# Altium PCB PCB1.PcbDoc
Units mm, origin at the board's own origin, x right, y up, seen from the top; angles counter-clockwise.
Board outline 58 x 59 mm, 2 copper layers (Top Layer, Bottom Layer); 12 components, 9 nets, 60 pads, 17 vias.
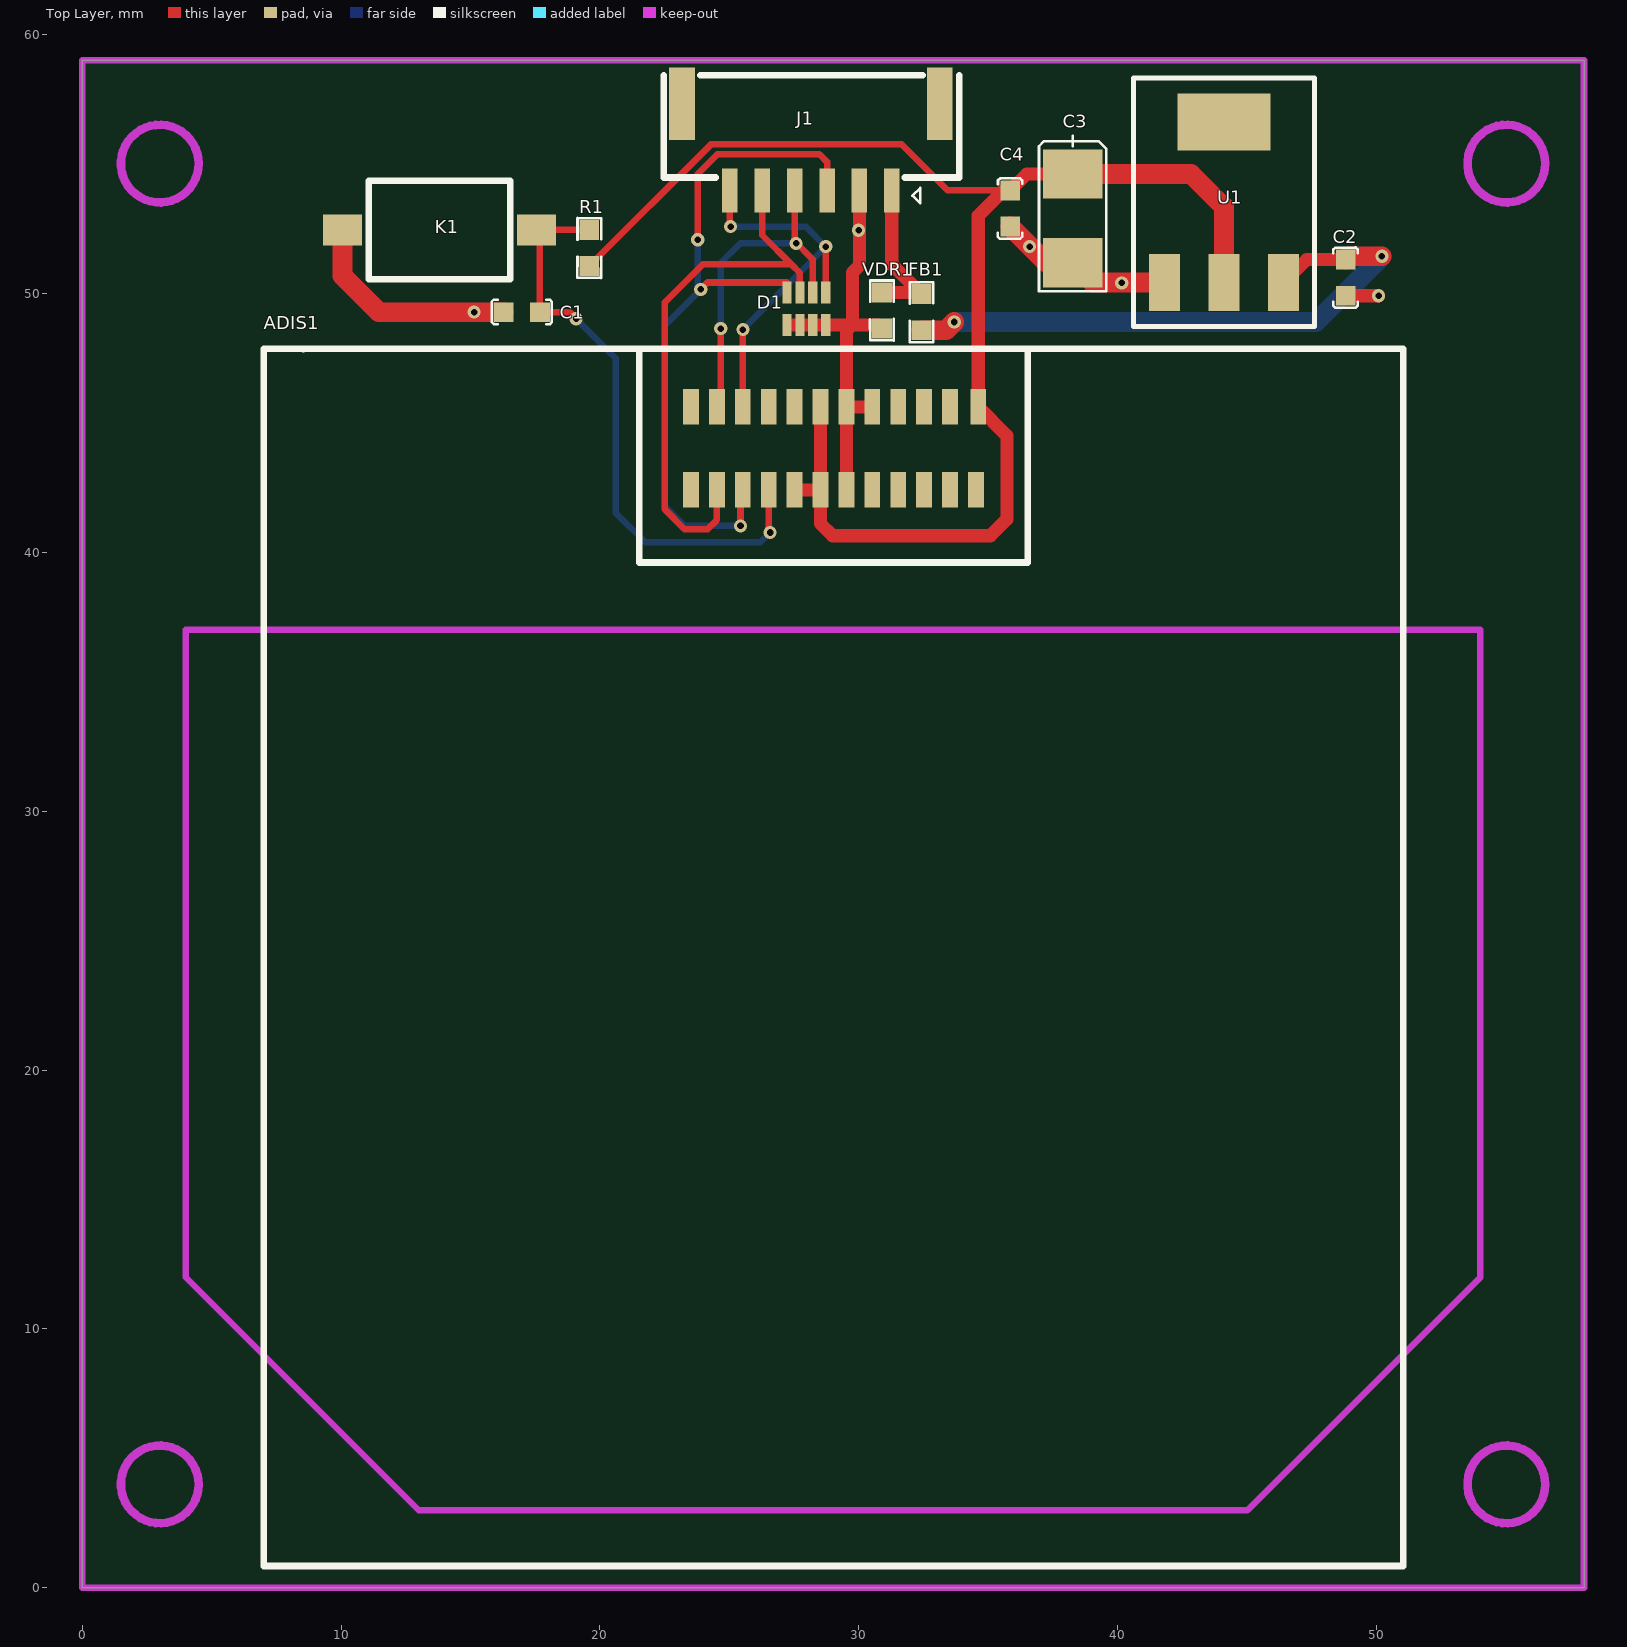
[diagram p0: Top Layer view]
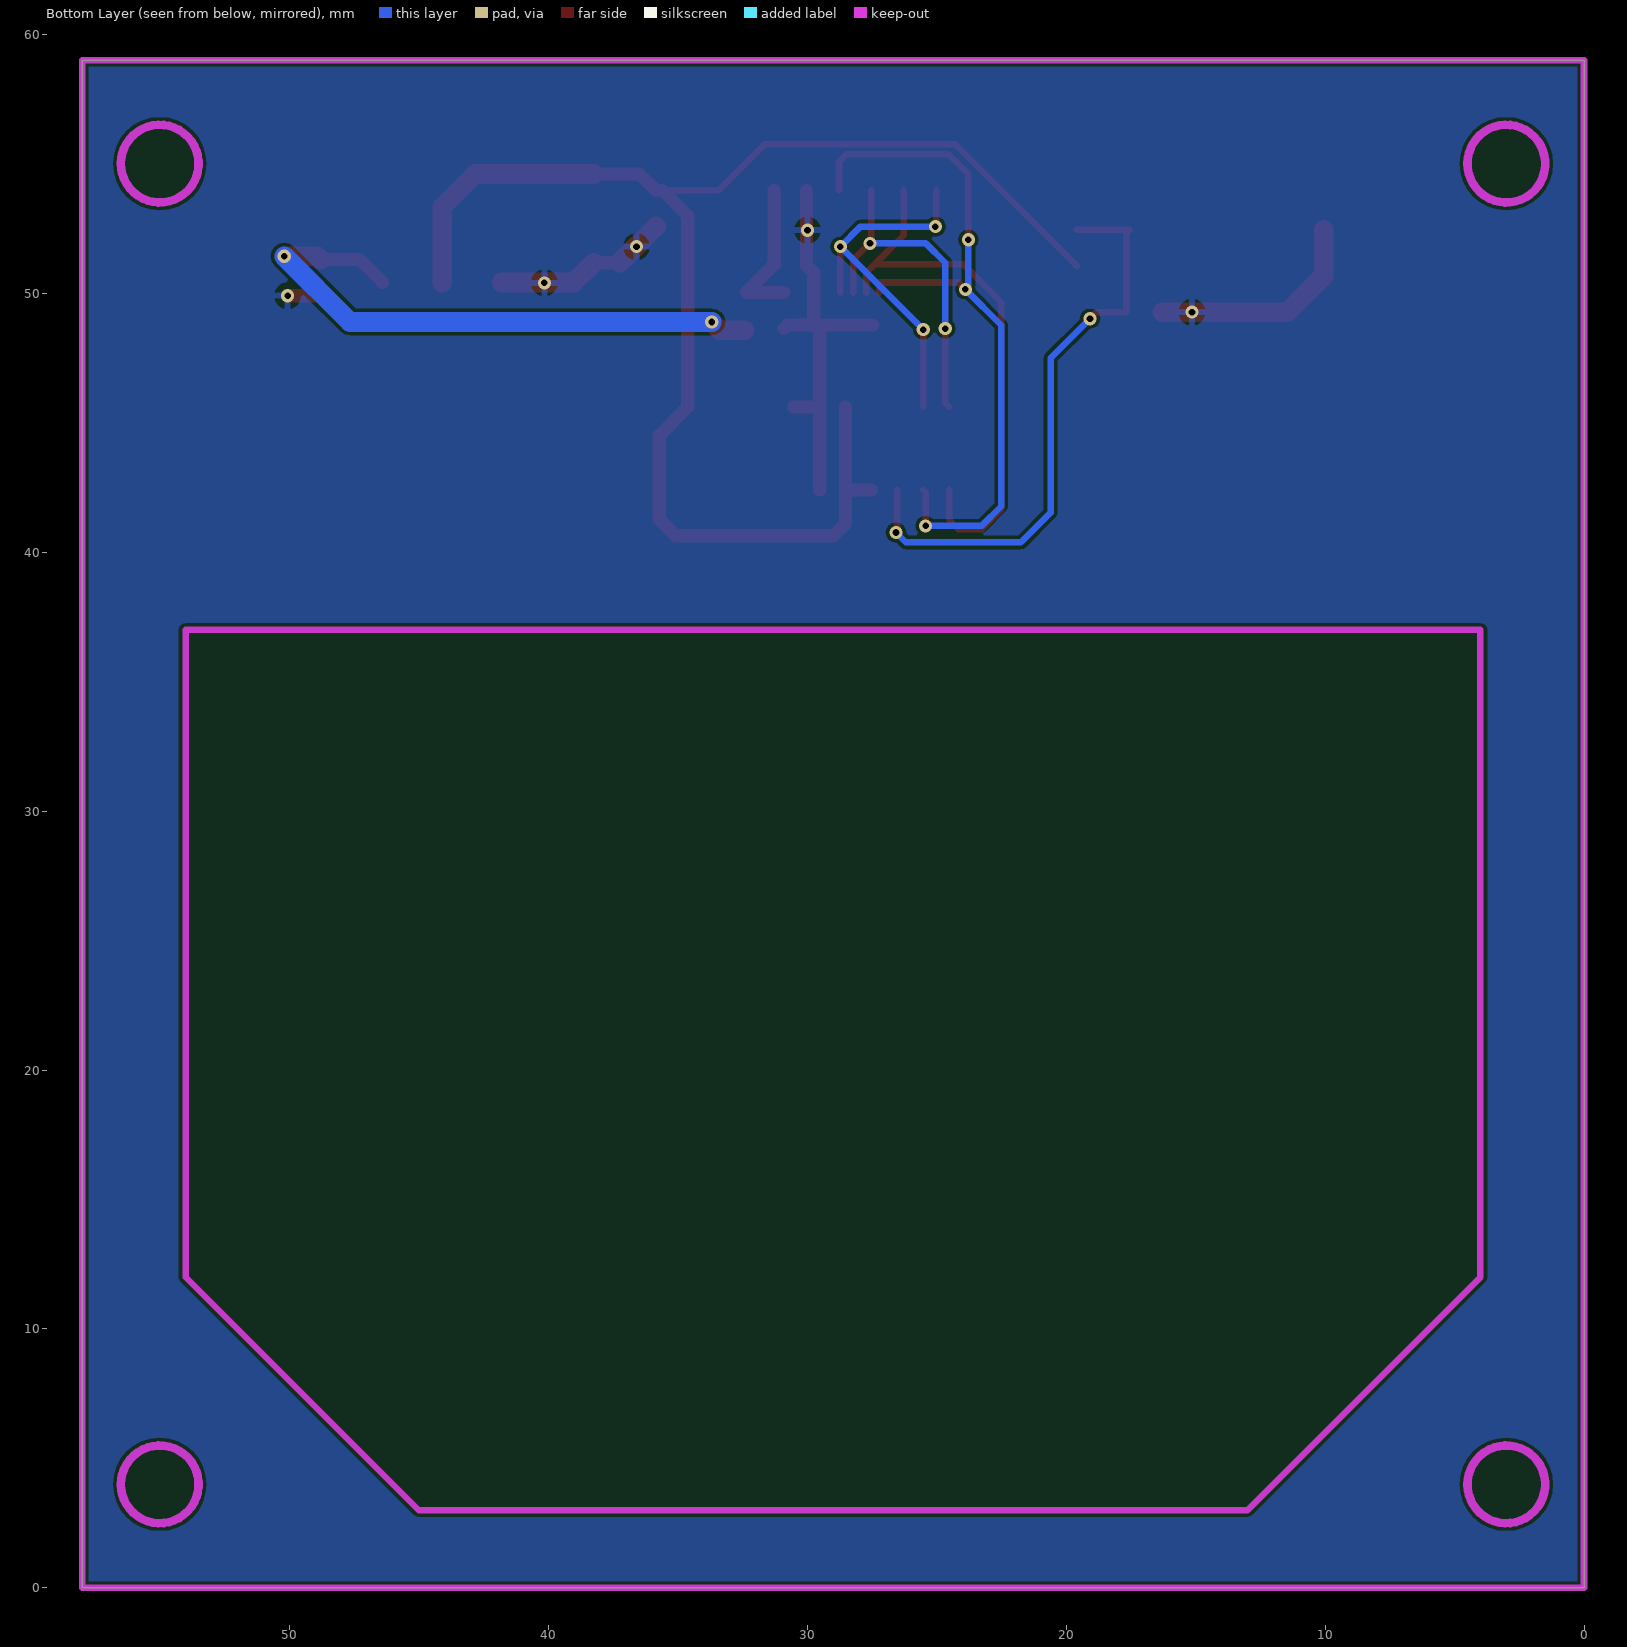
[diagram p1: Bottom Layer view, seen from below]

## Layer stack, top to bottom
Top Solder: solder mask 0.0102, Solder Resist, Dk 3.5
Top Layer: signal copper 0.0356
Dielectric 1: dielectric 0.32, FR-4, Dk 4.8
Bottom Layer: signal copper 0.0356
Bottom Solder: solder mask 0.0102, Solder Resist, Dk 3.5

## Board outline
0,0 0,59 58,59 58,0

## Design rules (kind name [scope] priority, off if disabled: settings)
Clearance [All] p1: gap=0.127
HoleToHoleClearance [All] p1: gap=0 allowstackedmicrovias=TRUE
MinimumSolderMaskSliver [All] p1: minsoldermaskwidth=0
PolygonConnect [All] p1: connectstyle=Relief reliefconductorwidth=0.254 reliefentries=4 polygonreliefangle="90 Angle" airgapwidth=0.254
RoutingVias [All] p1: holewidth=0.254 width=0.508 viastyle="Through Hole" minholewidth=0.254 minwidth=0.508 maxholewidth=0.254 maxwidth=0.508
SilkToSilkClearance [All] p1: silktosilkclearance=0
SilkToSolderMaskClearance [IsPad] p1: minsilkscreentomaskgap=0 clearancetoexposedcopper=TRUE
SolderMaskExpansion [All] p1: expansion=0.102
UnpouredPolygon [All] p1: allowunpoured=FALSE
Width [All] p1: maxlimit=0.762 minlimit=0.254 preferedwidth=0.254
25 further rules are at their usual default settings.

## Components (designator, comment, footprint, x,y, rotation, side; value= is the part's Value field where it differs from the comment)
ADIS1 "iSensor-10" iSensor 29.062,44.005 r0 top
C1 "0.1uF" 0603C 16.283,49.267 r0 top
C2 "0.1uF" 0603C 48.795,49.902 r90 top
C3 "22uF/6.3V" 3528/B 38.254,51.172 r90 top
C4 "0.1uF" 0603C 35.841,52.569 r90 top
D1 "82380050100" 82380050100 27.967,49.394 r180 top
FB1 "742792625" 0603-FB 32.412,49.267 r270 top
J1 "iSensor" GH1.25-6 31.269,53.966 r180 top
K1 "RESET_Key" "3*6*2.5 SMD" 17.553,52.442 r180 top
R1 "180K" 0603R 19.585,52.442 r270 top
U1 "AMS1117-3.3V" SOT223 40.54,58.538 r0 top
VDR1 "82536040" 0603R 30.888,48.632 r90 top

## Footprints (in the part's own frame and the unit in brackets; to place one, negate y for a bottom-side part, rotate by r counter-clockwise, add the part's x,y. Pads: shape width x height; smd on the part's side, far side on the other; paste and mask are expansions set on the pad)
"3*6*2.5 SMD" [mm]
  rect 1.5x1.2 smd: 1(0,0) 2(7.5,0)
  silkscreen extent 1.02,-1.91 6.48,1.91
0603-FB [mil]
  rect 30x30 smd: 1(-27.5,0) 2(27.5,0)
  silkscreen extent -46,-18 46,18
0603C [mil]
  rect 30x30 smd: 1(0,0) 2(55,0)
  silkscreen extent -19,-18 73,19
0603R [mil]
  rect 30x30 smd: 1(0,0) 2(55,0)
  silkscreen extent -18,-18 73,18
3528/B [mil]
  rect 75x90 smd: 1(135,0) 2(0,0)
  silkscreen extent -43,-51 193,51
82380050100 [mm]
  rect 0.35x0.85 smd: 1(-0.75,0.625) 2(-0.75,-0.625) 3(-0.25,0.625) 4(-0.25,-0.625) 5(0.25,0.625) 6(0.25,-0.625) 7(0.75,0.625) 8(0.75,-0.625)
GH1.25-6 [mm]
  rect 1x2.8 smd: 0(-1.85,-3.35) 0(8.1,-3.35)
  rect 0.6x1.7 smd: 1(0,0) 2(1.25,0) 3(2.5,0) 4(3.75,0) 5(5,0) 6(6.25,0)
  silkscreen extent -2.6,-4.45 8.8,0.5
iSensor [mil]
  rect 24x54 smd: 1(-218.35,63.03) 2(-218.35,-63.03) 3(-178.98,63.03) 4(-178.98,-63.03) 5(-139.61,63.03) 6(-139.61,-63.03) 7(-100.24,63.03) 8(-100.24,-63.03) 9(-60.87,63.03) 10(-60.87,-63.03) 11(-21.5,63.03) 12(-21.5,-63.03) 13(17.87,63.03) 14(17.87,-63.03) 15(57.24,63.03) 16(57.24,-63.03) 17(96.61,63.03) 18(96.61,-63.03) 19(135.98,63.03) 20(135.98,-63.03) 21(175.35,63.03) 22(175.35,-63.03) 23(218.35,63.03) 24(214.72,-63.03)
  silkscreen extent -868,-1699 864,151
SOT223 [mm]
  rect 1.2x2.2 smd: 1(1.256,-8.128) 2(3.556,-8.128) 3(5.856,-8.128)
  rect 3.6x2.2 smd: ""(3.556,-1.928)
  silkscreen extent 0.06,-9.83 7.06,-0.23

## Part data
C1: library part Cap
C2 C4: library part C
C3: library part C-POLAR
D1: library part DIODE-TVS/Array
FB1: library part FB
J1: library part HEAD1X6
R1: library part R
U1: library part AS1117M3-3.3V, "5V-3.3V"
VDR1: library part Varistor

## Via types
v1: diameter 0.508, hole 0.254, Top Layer to Bottom Layer, 17 vias

## Nets (pads, with @x,y where several pads share a name; then routed paths per layer and width w, separated by ;. In a path a pad name is that pad's centre, name@x,y a point inside that pad or via, vN(x,y) a via of type N, cw(c..) or ccw(c..) an arc to the next point about the centre after c; other vN are vias at no path point)
C\S\: ADIS1.6 D1.8 J1.3 | length 28.5
  Top Layer w0.254: v1(23.776,52.061) 23.776,54.601 24.538,55.363 28.475,55.363 28.769,55.069 J1.3 ; v1(23.891,50.144) 24.157,50.41 27.205,50.41 27.217,50.398 D1.8 ; v1(25.427,41.012) 25.427,42.315 ADIS1.6
  Bottom Layer w0.254: v1(23.776,52.061) 23.776,50.259 v1(23.891,50.144) 22.506,48.759 22.506,41.774 23.268,41.012 v1(25.427,41.012)
DIN: ADIS1.5 D1.2 J1.6 | length 14.7
  Top Layer w0.254: J1.6 25.019,52.596 v1(25.046,52.569) ; ADIS1.5 v1(25.516,48.594) ; D1.2 v1(28.717,51.795)
  Bottom Layer w0.254: v1(25.046,52.569) 27.943,52.569 v1(28.717,51.795) v1(25.516,48.594)
DOUT: ADIS1.4 D1.6 J1.5 | length 21.7
  Top Layer w0.254: ADIS1.4 24.516,41.244 24.157,40.885 23.268,40.885 22.506,41.647 22.506,49.648 23.967,51.109 27.396,51.109 ; J1.5 26.269,52.235 27.396,51.109 ; D1.6 27.717,50.787 27.396,51.109
GND: ADIS1.13 ADIS1.14 ADIS1.15 C1.1 C2.1 C3.2 C4.1 D1.1 D1.3 D1.5 D1.7 J1.2 K1.2 U1.1 VDR1.1 | length 33
  Top Layer w0.508: 27.459,48.769 D1.5 D1.3 D1.1 29.745,48.769 ; ADIS1.14 ADIS1.13 ; J1.2 30.019,51.065 29.745,50.791 29.745,48.769 ; ADIS1.15 ADIS1.13 ; VDR1.1 30.751,48.769 29.745,48.769 ; C3.2@37.238,51.172 C3.2 ; C2.1 v1(50.065,49.902) ; ADIS1.13 29.516,48.54 29.745,48.769
  Top Layer w0.762: K1.2 10.053,50.671 11.457,49.267 v1(15.14,49.267) C1.1 ; C4.1 C3.2@37.238,51.172 ; C3.2 39.016,50.41 U1.1
  other v1: 40.147,50.398 36.591,51.795 29.987,52.43
NetFB1_1: FB1.1 J1.1 VDR1.2 | length 5.8
  Top Layer w0.508: VDR1.2 32.349,50.029 31.269,51.109 J1.1
R\S\T\: ADIS1.8 C1.2 K1.1 R1.1 | length 23.2
  Top Layer w0.254: v1(19.077,49.013) 18.823,49.267 C1.2 17.68,52.315 K1.1 R1.1 ; ADIS1.8 26.516,40.812 v1(26.57,40.758)
  Bottom Layer w0.254: v1(19.077,49.013) 20.601,47.489 20.601,41.52 21.744,40.377 26.189,40.377 v1(26.57,40.758)
SCLK: ADIS1.3 D1.4 J1.4 | length 13.1
  Top Layer w0.254: ADIS1.3 24.665,45.755 v1(24.665,48.632) ; J1.4 27.519,52.001 28.217,51.303 D1.4
  Bottom Layer w0.254: v1(24.665,48.632) 24.665,51.172 25.415,51.922 v1(27.574,51.922)
VCC3V3: ADIS1.10 ADIS1.11 ADIS1.12 ADIS1.23 C3.1 C4.2 R1.2 U1.2 | length 57.6
  Top Layer w0.254: R1.2 24.284,55.744 31.65,55.744 33.428,53.966 35.587,53.966 C4.2
  Top Layer w0.508: ADIS1.10 ADIS1.12 ; ADIS1.11 ADIS1.12 ; C4.2@35.587,53.966 34.608,52.987 ADIS1.23 35.714,44.5 35.714,41.266 35.079,40.631 28.983,40.631 28.516,41.098 ADIS1.12 ; C4.2 36.476,54.601 C3.1
  Top Layer w0.762: C3.1 42.826,54.601 44.096,53.331 U1.2
VDD5_PERIPH: C2.2 FB1.2 U1.3 | length 23.2
  Top Layer w0.508: U1.3 47.285,51.299 C2.2
  Top Layer w0.762: FB1.2 33.365,48.569 v1(33.682,48.886) ; C2.2 48.922,51.426 v1(50.192,51.426)
  Bottom Layer w0.762: v1(33.682,48.886) 47.652,48.886 v1(50.192,51.426)
pads on no net: ADIS1.1 ADIS1.2 ADIS1.7 ADIS1.9 ADIS1.16 ADIS1.17 ADIS1.18 ADIS1.19 ADIS1.20 ADIS1.21 ADIS1.22 ADIS1.24 J1.0 U1.

## Polygon pours and split planes (outlines as drawn)
GND on Bottom Layer "Bottom Layer-No Net" (solid, remove dead copper, pour order 4): -1,62 65,62 65,-12 66,-13 -7,-13 -7,56 -1,62

## Keep-outs
Keep-Out Layer:
  circle w0.33: c3,55 r1.5
  circle w0.33: c3,4 r1.5
  circle w0.33: c55,4 r1.5
  circle w0.33: c55,55 r1.5
  lines w0.254: 0,0 58,0 58,59 0,59 0,0 ; 4,12 13,3 45,3 54,12 54,37 4,37 4,12

## Silkscreen, mask and mechanical layers (free items; w line width, h text height)
Mechanical 1:
  circle w0.33: c55,55 r1.5
  circle w0.33: c3,55 r1.5
  circle w0.33: c3,4 r1.5
  circle w0.33: c55,4 r1.5
  lines w0.254: 0,0 58,0 58,59 0,59 0,0 ; 0,0 0,0 ; 4,12 13,3 ; 4,12 4,37 ; 4,12 13,3 ; 4,12 4,37 ; 4,37 54,37 ; 13,3 45,3 ; 13,3 45,3 ; 45,3 54,12 ; 45,3 54,12 ; 54,12 54,37 ; 54,12 54,37

## Dimensions
58,59 to 58,0 on Keep-Out Layer
0,59 to 58,59 on Keep-Out Layer